# Altium PCB ZD-STM32-ZOUYU(remove layoout).PcbDoc (part 4 of 8)
Units mm, origin at the board's own origin, x right, y up, seen from the top; angles counter-clockwise.
Board outline 251.84 x 139.06 mm, 2 copper layers (Top Layer, Bottom Layer); 253 components, 246 nets, 1172 pads, 599 vias.
Unrouted connection lines stored in the file: 47.
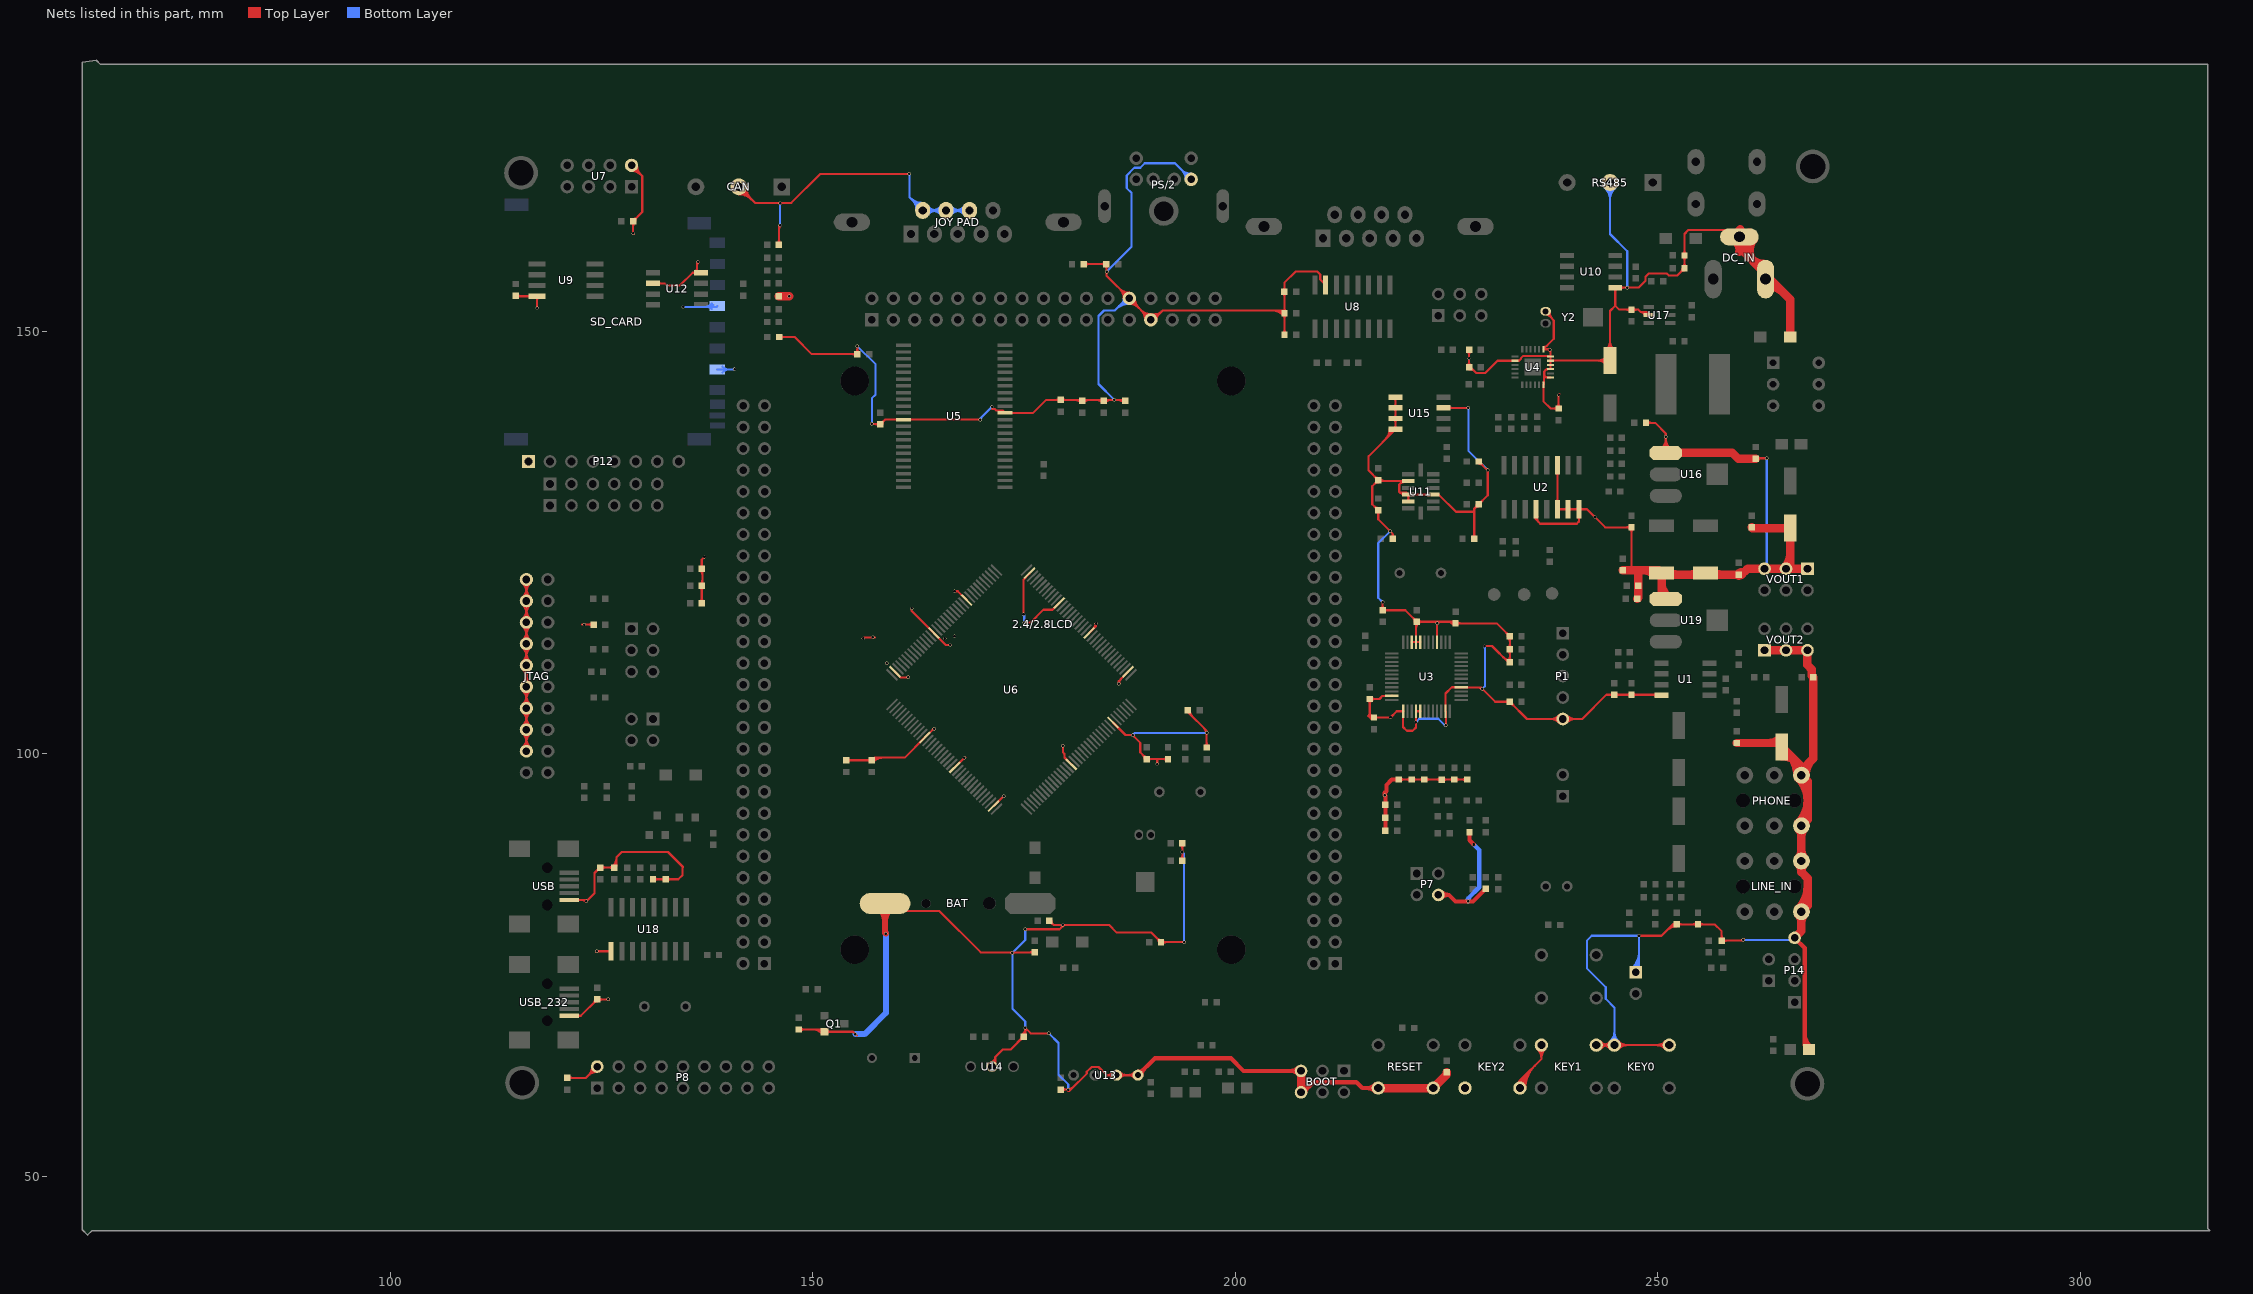
[diagram p4: the nets of this part, all layers, seen from the top]

## Via types
v1: diameter 0.4, hole 0.3, Top Layer to Bottom Layer, 598 vias
v2: diameter 0.3, hole 0.2, Top Layer to Bottom Layer, 1 vias

## Nets (pads, with @x,y where several pads share a name; then routed paths per layer and width w, separated by ;. In a path a pad name is that pad's centre, name@x,y a point inside that pad or via, vN(x,y) a via of type N, cw(c..) or ccw(c..) an arc to the next point about the centre after c; other vN are vias at no path point) (continued)
GND: 2.4/2.8LCD.26 2.4/2.8LCD.27 "JOY PAD.6" "JOY PAD.7" "JOY PAD.8" BAT.2 BOOT.5 BOOT.6 C3.2 C6.2 C7.1 C8.1 C9.2 C10.1 C11.1 C12.1 C13.1 C14.1 C15.1 C16.1 C17.1 C18.1 C19.1 C20.1 C21.1 C24.1 C26.1 C27.1 C28.1 C29.2 C35.1 C36.1 C37.1 C38.1 C39.1 C40.1 C41.1 C42.1 C43.2 C44.1 C45.1 C46.1 C47.1 C48.1 C49.1 C50.1 C51.1 C52.2 C53.2 C54.2 C55.2 C56.2 C57.2 C58.2 C59.2 C60.2 C61.2 C62.2 C63.2 C64.2 C66.1 C68.1 C69.1 C70.2 C71.2 C72.2 C73.1 C74.1 C75.1 C76.2 C77.1 C78.1 C79.1 C80.1 C82.1 C83.1 C84.1 C85.2 C86.1 C87.1 C88.2 C89.1 C90.1 C91.2 C92.2 C93.1 C94.1 C95.1 C96.1 C97.1 C98.1 C99.1 CAN.2 D3.1 D5.1 D6.1 DC_IN.2 DC_IN.3 JTAG.4 JTAG.6 JTAG.8 JTAG.10 JTAG.12 JTAG.14 JTAG.16 JTAG.18 JTAG.20 KEY0.1 KEY1.1 KEY2.1 LINE_IN.3 OLED.1 P1.5 P7.4 P8.2 P12.1 P14.4 PHONE.3 PS/2.3 Q1.1 R9.1 R20.1 R24.1 R25.1 R42.1 R60.1 R65.2 RESET.2 RS485.2 SD_CARD.3 SD_CARD.6 SYS.2 U1.4 U2.4 U2.6 U2.7 U2.8 U2.11 U3.4 U3.16 U3.20 U3.21 U3.22 U3.35 U3.37 U3.40 U3.41 U3.47 U4.1 U4.3 U4.4 U4.5 U4.6 U4.7 U4.14 U4.24 U5.12 U5.34 U6.16 U6.30 U6.38 U6.51 U6.61 U6.71 U6.83 U6.94 U6.107 U6.120 U6.130 U6.143 U7.1 U8.15 U9.4 U10.5 U11.2 U11.4 U11.5 U11.10 U12.2 U12.8 U13.3 U13.4 U14.2 U15.1 U15.2 U15.3 U15.4 U15.7 U16.1 U17.2 U18.1 U19.1 USB.5 USB_232.5 VOUT1.1 VOUT1.3 VOUT1.5 VOUT2.1 VOUT2.3 VOUT2.5 Y2.1 | length 1442
  Top Layer w0.254: C71.2@114.806,154.242 114.871,154.176 U9.4@117.348,154.176 v1(117.348,152.781) ; C71.2@114.986,154.062 cw(c115.262,153.786) 115.262,154.176 ; C71.2@114.986,154.421 ccw(c115.577,155.012) 115.577,154.176 ; JTAG.4@115.637,100.771 ccw(c114.574,101.834) 116.078,101.834 ccw(c117.582,101.834) JTAG.4@116.519,100.771 ; JTAG.6@115.637,102.429 cw(c114.574,101.366) 116.078,101.366 cw(c117.582,101.366) JTAG.6@116.519,102.429 ; JTAG.6@115.637,103.311 ccw(c114.574,104.374) 116.078,104.374 ccw(c117.582,104.374) JTAG.6@116.519,103.311 ; JTAG.8@115.637,104.969 cw(c114.574,103.906) 116.078,103.906 cw(c117.582,103.906) JTAG.8@116.519,104.969 ; JTAG.8@115.637,105.851 ccw(c114.574,106.914) 116.078,106.914 ccw(c117.582,106.914) JTAG.8@116.519,105.851 ; JTAG.10@115.637,107.509 cw(c114.574,106.446) 116.078,106.446 cw(c117.582,106.446) JTAG.10@116.519,107.509 ; JTAG.10@115.637,108.391 ccw(c114.574,109.454) 116.078,109.454 ccw(c117.582,109.454) JTAG.10@116.519,108.391 ; JTAG.12@115.637,110.049 cw(c114.574,108.986) 116.078,108.986 cw(c117.582,108.986) JTAG.12@116.519,110.049 ; JTAG.12@115.637,110.931 ccw(c114.574,111.994) 116.078,111.994 ccw(c117.582,111.994) JTAG.12@116.519,110.931 ; JTAG.14@115.637,112.589 cw(c114.574,111.526) 116.078,111.526 cw(c117.582,111.526) JTAG.14@116.519,112.589 ; JTAG.14@115.637,113.471 ccw(c114.574,114.534) 116.078,114.534 ccw(c117.582,114.534) JTAG.14@116.519,113.471 ; JTAG.16@115.637,115.129 cw(c114.574,114.066) 116.078,114.066 cw(c117.582,114.066) JTAG.16@116.519,115.129 ; JTAG.16@115.637,116.011 ccw(c114.574,117.074) 116.078,117.074 ccw(c117.582,117.074) JTAG.16@116.519,116.011 ; JTAG.18@115.637,117.669 cw(c114.574,116.606) 116.078,116.606 cw(c117.582,116.606) JTAG.18@116.519,117.669 ; JTAG.18@115.637,118.551 ccw(c114.574,119.614) 116.078,119.614 ccw(c117.582,119.614) JTAG.18@116.519,118.551 ; JTAG.20@115.637,120.209 cw(c114.574,119.146) 116.078,119.146 cw(c117.582,119.146) JTAG.20@116.519,120.209 ; JTAG.4@115.817,100.591 ccw(c115.187,101.221) 116.078,101.221 ccw(c116.969,101.221) JTAG.4@116.339,100.591 ; JTAG.6@115.817,102.609 cw(c115.187,101.979) 116.078,101.979 cw(c116.969,101.979) JTAG.6@116.339,102.609 ; JTAG.6@115.817,103.131 ccw(c115.187,103.761) 116.078,103.761 ccw(c116.969,103.761) JTAG.6@116.339,103.131 ; JTAG.8@115.817,105.149 cw(c115.187,104.519) 116.078,104.519 cw(c116.969,104.519) JTAG.8@116.339,105.149 ; JTAG.8@115.817,105.671 ccw(c115.187,106.301) 116.078,106.301 ccw(c116.969,106.301) JTAG.8@116.339,105.671 ; JTAG.10@115.817,107.689 cw(c115.187,107.059) 116.078,107.059 cw(c116.969,107.059) JTAG.10@116.339,107.689 ; JTAG.10@115.817,108.211 ccw(c115.187,108.841) 116.078,108.841 ccw(c116.969,108.841) JTAG.10@116.339,108.211 ; JTAG.12@115.817,110.229 cw(c115.187,109.599) 116.078,109.599 cw(c116.969,109.599) JTAG.12@116.339,110.229 ; JTAG.12@115.817,110.751 ccw(c115.187,111.381) 116.078,111.381 ccw(c116.969,111.381) JTAG.12@116.339,110.751 ; JTAG.14@115.817,112.769 cw(c115.187,112.139) 116.078,112.139 cw(c116.969,112.139) JTAG.14@116.339,112.769 ; JTAG.14@115.817,113.291 ccw(c115.187,113.921) 116.078,113.921 ccw(c116.969,113.921) JTAG.14@116.339,113.291 ; JTAG.16@115.817,115.309 cw(c115.187,114.679) 116.078,114.679 cw(c116.969,114.679) JTAG.16@116.339,115.309 ; JTAG.16@115.817,115.831 ccw(c115.187,116.461) 116.078,116.461 ccw(c116.969,116.461) JTAG.16@116.339,115.831 ; JTAG.18@115.817,117.849 cw(c115.187,117.219) 116.078,117.219 cw(c116.969,117.219) JTAG.18@116.339,117.849 ; JTAG.18@115.817,118.371 ccw(c115.187,119.001) 116.078,119.001 ccw(c116.969,119.001) JTAG.18@116.339,118.371 ; JTAG.20@115.817,120.389 cw(c115.187,119.759) 116.078,119.759 cw(c116.969,119.759) JTAG.20@116.339,120.389 ; JTAG.4@116.078,100.33 JTAG.6@116.078,102.87 JTAG.8@116.078,105.41 JTAG.10@116.078,107.95 JTAG.12@116.078,110.49 JTAG.14@116.078,113.03 JTAG.16@116.078,115.57 JTAG.18@116.078,118.11 JTAG.20@116.078,120.65 ; U9.4@116.511,154.051 ccw(c116.208,153.747) 116.208,154.176 ccw(c116.208,154.606) U9.4@116.511,154.302 ; U9.4@117.222,154.051 cw(c116.919,153.747) 117.348,153.747 cw(c117.777,153.747) U9.4@117.474,154.051 ; C63.2@120.906,61.658 123.126,61.658 P8.2@124.46,62.992 ; C63.2@121.085,61.479 cw(c121.519,61.045) 121.519,61.658 cw(c121.519,62.272) C63.2@121.085,61.838 ; USB_232.5@121.134,69.012 122.53,69.012 C96.1@124.46,70.942 v1(125.781,70.942) v1@125.857,70.866 ; USB.5@121.134,82.728 123.012,82.728 v1(123.19,82.55) 124.133,83.493 124.133,85.906 124.777,86.55 C91.2@124.843,86.55 C92.2@126.494,86.55 ; USB_232.5@122.121,68.925 cw(c122.331,68.715) 122.331,69.012 cw(c122.331,69.309) USB_232.5@122.121,69.099 ; USB.5@122.121,82.641 cw(c122.331,82.431) 122.331,82.728 cw(c122.331,83.025) USB.5@122.121,82.815 ; 122.584,82.728 cw(c122.584,81.944) v1@123.138,82.498 ; 122.682,115.316 R42.1@124.028,115.316 ; P8.2@123.837,62.992 cw(c122.333,62.992) 123.396,61.928 cw(c124.46,60.865) P8.2@124.46,62.369 ; R42.1@123.849,115.136 ccw(c123.415,114.703) 123.415,115.316 ccw(c123.415,115.929) R42.1@123.849,115.496 ; P8.2@124.091,62.992 cw(c123.2,62.992) 123.83,62.362 cw(c124.46,61.732) P8.2@124.46,62.623 ; C96.1@124.206,70.942 cw(c123.593,70.942) 124.026,70.509 cw(c124.46,70.075) C96.1@124.46,70.688 ; 124.298,86.071 cw(c124.843,85.526) C91.2@124.843,86.296 ; v1@124.333,76.581 v1(124.4,76.648) U18.1@126.111,76.648 ; 124.455,86.228 ccw(c124.133,86.55) C91.2@124.589,86.55 ; C96.1@124.64,70.763 cw(c125.073,70.329) 125.073,70.942 cw(c125.073,71.555) C96.1@124.64,71.122 ; C91.2@125.022,86.371 cw(c125.456,85.937) 125.456,86.55 cw(c125.456,87.164) C91.2@125.022,86.73 ; U18.1@125.989,76.526 ccw(c125.693,76.23) 125.693,76.648 ccw(c125.693,77.066) U18.1@125.989,76.77 ; C92.2@126.314,86.371 ccw(c125.88,85.937) 125.88,86.55 ccw(c125.88,87.164) C92.2@126.314,86.73 ; C92.2@126.316,86.732 ccw(c125.31,87.757) 126.746,87.757 ; 126.746,87.152 cw(c125.904,87.152) C92.2@126.494,86.55 ; U7.1@128.524,169.012 cw(c128.524,167.417) 129.651,168.545 cw(c130.779,169.672) U7.1@129.184,169.672 ; U7.1@128.524,169.266 cw(c128.524,168.284) 129.218,168.978 cw(c129.912,169.672) U7.1@128.93,169.672 ; U7.1@128.524,169.672 129.794,168.402 129.794,164.146 C70.2@128.714,163.066 v1(128.714,161.607) v1@128.778,161.544 ; C70.2@128.535,162.887 cw(c128.101,162.453) 128.714,162.453 cw(c129.328,162.453) C70.2@128.894,162.887 ; C70.2@128.714,163.32 ccw(c128.714,163.934) 129.148,163.5 ccw(c129.582,163.066) C70.2@128.969,163.066 ; U12.2@130.556,155.702 132.461,155.702 v1(132.715,155.448) 134.239,155.448 135.763,156.972 136.256,156.972 136.256,158.1 v1(136.398,158.242) ; C99.1@131.064,85.166 C98.1@132.588,85.166 134.061,85.166 134.556,85.661 134.556,86.577 134.607,86.627 132.842,88.392 127.381,88.392 126.746,87.757 ; C99.1@131.244,84.987 cw(c131.677,84.553) 131.677,85.166 cw(c131.677,85.779) C99.1@131.244,85.346 ; U12.2@131.707,155.567 cw(c132.032,155.242) 132.032,155.702 cw(c132.032,156.162) U12.2@131.707,155.837 ; C98.1@132.408,84.987 ccw(c131.975,84.553) 131.975,85.166 ccw(c131.975,85.779) C98.1@132.408,85.346 ; C98.1@132.768,84.987 cw(c133.201,84.553) 133.201,85.166 cw(c133.201,85.779) C98.1@132.768,85.346 ; U12.8@136.121,156.837 ccw(c135.796,156.512) 135.796,156.972 ccw(c135.796,157.432) 136.121,157.107 ccw(c135.796,157.432) 136.256,157.432 ccw(c136.716,157.432) U12.8@136.391,157.107 ; 136.256,157.723 cw(c136.917,157.723) v1@136.45,158.19 ; C60.2@136.663,118.034 ccw(c136.229,118.468) 136.843,118.468 ccw(c137.456,118.468) C60.2@137.022,118.034 ; C62.2@136.663,119.707 cw(c136.229,119.273) 136.843,119.273 cw(c137.456,119.273) C62.2@137.022,119.707 ; C62.2@136.663,120.066 ccw(c136.076,120.653) 136.906,120.653 ; C61.2@136.663,121.739 cw(c136.076,121.152) 136.906,121.152 ; C61.2@136.663,122.098 ccw(c136.229,122.532) 136.843,122.532 ccw(c137.456,122.532) C61.2@137.022,122.098 ; C60.2@136.843,117.854 C62.2@136.843,119.886 ; C61.2@136.843,121.918 136.843,122.999 v1(137.16,123.317) ; C62.2@136.906,120.142 C61.2@136.906,122.174 ; 136.906,120.346 ccw(c137.302,120.346) C62.2@137.022,120.066 ; 136.906,121.458 cw(c137.302,121.458) C61.2@137.022,121.739 ; CAN.2@141.224,166.259 cw(c141.224,164.151) 142.714,165.642 cw(c144.205,167.132) CAN.2@142.097,167.132 ; CAN.2@141.224,166.513 cw(c141.224,165.019) 142.281,166.075 cw(c143.337,167.132) CAN.2@141.843,167.132 ; CAN.2@141.224,167.132 143.129,165.227 144.526,165.227 147.447,165.227 150.876,168.656 v1(161.417,168.656) ; C68.1@145.794,160.454 ccw(c145.361,160.887) 145.974,160.887 ccw(c146.587,160.887) C68.1@146.153,160.454 ; 145.802,165.227 cw(c145.802,164.877) v1@146.049,165.125 ; C76.2@145.974,149.363 C76.2@145.987,149.35 147.83,149.35 149.858,147.322 C43.2@155.257,147.322 v1(155.257,148.273) ; C68.1@145.974,160.274 145.974,162.433 v1(146.101,162.56) ; 145.974,162.077 cw(c146.584,162.077) v1@146.152,162.508 ; v1@146.152,165.125 cw(c146.4,164.877) 146.4,165.227 ; C76.2@146.166,149.171 cw(c146.6,148.737) 146.6,149.35 cw(c146.6,149.964) C76.2@146.166,149.53 ; R60.1@148.336,67.386 151.088,67.386 Q1.1@151.352,67.122 154.747,67.122 v1(155.029,66.84) 155.194,66.675 ; R60.1@148.516,67.207 cw(c148.949,66.773) 148.949,67.386 cw(c148.949,67.999) R60.1@148.516,67.566 ; 149.909,67.386 cw(c149.909,65.704) Q1.1@151.099,66.894 ; 150.523,67.386 cw(c150.523,66.318) Q1.1@151.278,67.073 ; Q1.1@151.605,66.894 cw(c152.157,66.342) 152.157,67.122 cw(c152.157,67.902) Q1.1@151.605,67.35 ; C53.2@153.926,99.251 C52.2@156.974,99.251 ; C53.2@154.105,99.071 cw(c154.539,98.637) 154.539,99.251 cw(c154.539,99.864) C53.2@154.105,99.43 ; C43.2@155.078,147.142 ccw(c154.644,146.708) 154.644,147.322 ccw(c154.644,147.935) 155.078,147.501 ccw(c154.644,147.935) 155.257,147.935 ccw(c155.871,147.935) C43.2@155.437,147.501 ; v1(155.956,113.665) 156.083,113.792 157.353,113.792 ; C52.2@156.794,99.071 ccw(c156.36,98.637) 156.36,99.251 ccw(c156.36,99.864) C52.2@156.794,99.43 ; v1(156.972,139.065) 157.937,139.065 C39.1@157.988,139.014 158.545,139.571 U5.34@160.729,139.571 v1@169.797,139.571 ; C52.2@157.153,99.071 cw(c158.353,97.871) 158.353,99.568 ; 157.252,139.065 cw(c157.252,138.278) C39.1@157.808,138.835 ; 157.497,139.065 ccw(c157.497,139.505) C39.1@157.808,139.194 ; 157.74,99.568 ccw(c157.74,98.484) C52.2@156.974,99.251 ; C39.1@157.988,139.268 ccw(c157.988,139.881) 158.422,139.448 ccw(c158.855,139.014) C39.1@158.242,139.014 ; BAT.2@158.534,82.296 159.411,81.419 164.944,81.419 169.846,76.517 C54.2@176.274,76.517 ; U6.107@159.71,109.729 160.409,109.029 161.226,109.029 v1(161.29,109.093) ; 160.959,109.029 ccw(c160.959,109.424) v1@161.238,109.145 ; v1(161.671,117.221) 161.671,116.96 U6.94@164.306,114.325 165.728,112.903 v1(166.243,112.903) ; 164.134,102.84 cw(c164.338,102.636) v1@164.338,102.924 ; v1(164.338,102.997) 164.292,102.997 U6.120@163.245,101.95 160.863,99.568 157.291,99.568 C52.2@156.974,99.251 ; v1(166.751,119.253) 167.156,119.253 U6.83@168.195,118.214 ; U6.130@166.781,98.415 v1(167.934,99.568) v1@168.021,99.568 ; U14.2@171.076,63.501 ccw(c170.925,64.135) 171.577,64.135 ; U14.2@171.134,63.254 ccw(c171.001,63.814) 171.577,63.814 ; U14.2@171.196,62.992 171.577,63.373 171.577,64.135 ; 171.196,140.843 171.495,140.843 171.694,140.644 172.456,140.644 U5.12@172.729,140.371 176.058,140.371 177.597,141.91 C40.1@179.324,141.91 184.406,141.91 v1(185.674,141.91) 186.831,141.91 C57.2@186.946,141.796 ; U6.143@171.377,93.819 172.554,94.996 v1(172.593,94.996) ; 172.402,94.844 cw(c172.593,94.653) v1@172.593,94.923 ; 173.279,76.517 cw(c173.279,76.124) v1@173.557,76.402 ; v1@173.661,76.402 cw(c173.939,76.124) 173.939,76.517 ; C80.1@174.676,66.548 cw(c174.063,66.548) 174.496,66.114 cw(c174.93,65.681) C80.1@174.93,66.294 ; C80.1@174.761,66.738 ccw(c174.03,67.564) v1(175.133,67.564) ; v1(174.92,116.545) 174.92,120.631 175.62,121.331 U6.71@175.62,121.396 ; v1(175.006,115.551) 175.766,115.551 177.275,117.06 178.355,117.06 U6.61@179.155,117.86 ; 175.133,67 cw(c174.53,67) C80.1@174.93,66.548 ; v1(175.133,79.248) 179.197,79.248 v1@179.705,79.756 ; C54.2@176.095,76.338 ccw(c175.661,75.904) 175.661,76.517 ccw(c175.661,77.131) C54.2@176.095,76.697 ; v1(177.927,66.929) 175.768,66.929 v1(175.133,67.564) ; C46.1@177.978,80.01 cw(c177.978,79.397) 178.411,79.83 cw(c178.845,80.264) C46.1@178.232,80.264 ; C46.1@177.978,80.264 178.486,79.756 v1(179.578,79.756) v1@179.705,79.756 ; C40.1@179.144,141.73 ccw(c178.711,141.297) 178.711,141.91 ccw(c178.711,142.523) C40.1@179.144,142.089 ; C78.1@179.324,60.274 v1(180.213,60.274) 180.528,60.274 182.411,62.157 182.411,62.381 182.983,62.953 183.793,62.953 184.77,61.976 ; 179.364,79.415 ccw(c179.022,79.756) v1@179.505,79.756 ; C78.1@179.504,60.095 cw(c179.937,59.661) 179.937,60.274 cw(c179.937,60.887) C78.1@179.504,60.454 ; C40.1@179.504,141.73 cw(c179.937,141.297) 179.937,141.91 cw(c179.937,142.523) C40.1@179.504,142.089 ; v1(179.578,100.965) 179.578,100.193 179.769,100.002 179.769,99.58 180.569,98.78 U6.16@180.569,98.769 ; v1@180.213,60.093 ccw(c180.213,60.416) 180.442,60.188 ; v1@180.213,60.347 ccw(c180.213,61.284) 180.875,60.621 ; 180.976,141.91 cw(c180.976,140.906) C59.2@181.686,141.616 ; C41.1@182.042,157.988 C42.1@184.734,157.988 v1@184.734,157.15 ; C59.2@182.045,141.616 cw(c182.755,140.906) 182.755,141.91 ; C41.1@182.221,157.808 cw(c182.655,157.375) 182.655,157.988 cw(c182.655,158.601) C41.1@182.221,158.168 ; U6.51@182.691,114.325 183.515,115.149 v1(183.515,115.443) ; U6.51@183.183,114.817 ccw(c182.557,115.443) v1@183.442,115.443 ; 183.516,141.91 cw(c183.516,140.906) C58.2@184.226,141.616 ; C42.1@184.555,158.168 cw(c184.121,158.601) 184.121,157.988 cw(c184.121,157.375) 184.555,157.808 cw(c184.121,157.375) 184.734,157.375 cw(c185.347,157.375) C42.1@184.914,157.808 ; C58.2@184.585,141.616 cw(c185.295,140.906) 185.295,141.91 ; 184.734,156.8 cw(c185.084,156.8) v1@184.837,157.047 ; 184.734,157.398 ccw(c185.084,157.398) v1@184.837,157.151 ; v1(184.785,157.099) v1@184.734,157.15 ; U6.30@185.519,103.718 187.002,102.235 v1(187.833,102.235) 187.833,102.218 188.741,101.31 188.741,100.184 189.484,99.441 C50.1@189.484,99.39 190.754,99.39 ; U13.3@185.536,61.63 ccw(c184.77,60.955) 184.77,61.976 ; U13.3@185.536,62.322 cw(c184.77,62.997) 184.77,61.976 ; 186.056,141.91 cw(c186.056,140.906) C57.2@186.766,141.616 ; v1(186.182,108.331) 186.182,108.624 U6.38@187.287,109.729 ; v1@186.255,108.331 cw(c187.138,108.331) 186.514,108.956 ; U13.3@186.298,61.606 cw(c187.191,60.713) 187.191,61.976 cw(c187.191,63.239) U13.3@186.298,62.346 ; 2.4/2.8LCD.26@186.792,153.924 ccw(c185.197,153.924) 186.325,155.051 ccw(c187.452,156.179) 2.4/2.8LCD.26@187.452,154.584 ; 2.4/2.8LCD.26@187.046,153.924 ccw(c186.064,153.924) 186.758,154.618 ccw(c187.452,155.312) 2.4/2.8LCD.26@187.452,154.33 ; 2.4/2.8LCD.26@187.452,153.264 cw(c187.452,151.669) 188.579,152.797 cw(c189.707,153.924) 2.4/2.8LCD.26@188.112,153.924 ; 2.4/2.8LCD.26@187.452,153.518 cw(c187.452,152.536) 188.146,153.23 cw(c188.84,153.924) 2.4/2.8LCD.26@187.858,153.924 ; v1@187.906,102.235 ccw(c188.123,102.235) 187.969,102.082 ; U13.4@188.098,61.606 ccw(c187.205,60.713) 187.205,61.976 ccw(c187.205,63.239) U13.4@188.098,62.346 ; U13.4@188.468,61.976 U13.3@185.928,61.976 184.77,61.976 ; 189.014,99.911 cw(c188.494,99.39) C50.1@189.23,99.39 ; 189.137,99.788 ccw(c189.484,100.135) C50.1@189.484,99.644 ; 2.4/2.8LCD.27@189.332,151.384 ccw(c187.737,151.384) 188.865,152.511 ccw(c189.992,153.639) 2.4/2.8LCD.27@189.992,152.044 ; 2.4/2.8LCD.27@189.586,151.384 ccw(c188.604,151.384) 189.298,152.078 ccw(c189.992,152.772) 2.4/2.8LCD.27@189.992,151.79 ; C50.1@189.664,99.211 cw(c190.097,98.777) 190.097,99.39 cw(c190.097,100.003) C50.1@189.664,99.57 ; 2.4/2.8LCD.27@190.011,151.535 ccw(c190.113,152.337) 190.685,151.766 ; 2.4/2.8LCD.27@190.043,151.787 ccw(c190.195,152.988) 191.051,152.132 ; 2.4/2.8LCD.27@190.075,152.039 ccw(c190.278,153.638) 191.418,152.498 ; 2.4/2.8LCD.27@190.652,151.384 cw(c191.495,151.384) 190.899,151.98 ; v1(190.754,98.806) 190.754,99.39 ; C55.2@190.945,77.722 ccw(c190.331,77.722) 190.765,78.156 ccw(c191.198,78.59) C55.2@191.198,77.976 ; C55.2@191.378,77.543 cw(c191.812,77.109) 191.812,77.722 cw(c191.812,78.336) C55.2@191.378,77.902 ; C47.1@191.844,99.211 ccw(c191.411,98.777) 191.411,99.39 ccw(c191.411,100.003) C47.1@191.844,99.57 ; C47.1@192.024,99.39 190.754,99.39 ; C44.1@193.546,87.556 ccw(c193.113,87.989) 193.726,87.989 ccw(c194.339,87.989) C44.1@193.905,87.556 ; C45.1@193.546,89.228 cw(c193.113,88.795) 193.726,88.795 cw(c194.339,88.795) C45.1@193.905,89.228 ; C44.1@193.726,87.376 v1(193.726,88.392) C45.1@193.726,89.408 ; v1@193.927,77.722 C55.2@191.198,77.722 190.073,78.848 185.964,78.848 185.056,79.756 v1@179.705,79.756 ; C56.2@194.373,105.158 194.373,104.965 196.596,102.743 v1(196.596,102.489) C48.1@196.596,100.762 ; C56.2@194.627,105.158 ccw(c195.705,105.158) 194.943,104.396 ; 196.292,103.047 cw(c195.734,102.489) v1@196.523,102.489 ; C48.1@196.416,100.941 ccw(c195.983,101.375) 196.596,101.375 ccw(c197.209,101.375) C48.1@196.776,100.941 ; 204.352,152.498 cw(c204.352,150.682) 205.637,151.966 cw(c205.203,151.533) 205.816,151.533 cw(c206.429,151.533) C69.1@205.996,151.966 ; 204.965,152.498 cw(c204.965,151.295) C69.1@205.816,152.146 ; C69.1@205.579,152.498 cw(c205.579,151.908) 205.996,152.326 cw(c206.46,152.79) 205.803,152.79 ; C64.2@205.624,154.508 cw(c205.19,154.074) 205.803,154.074 cw(c206.417,154.074) C64.2@205.983,154.508 ; C64.2@205.624,154.867 ccw(c205.19,155.301) 205.803,155.301 ccw(c206.417,155.301) C64.2@205.983,154.867 ; C66.1@205.637,149.786 ccw(c205.203,150.219) 205.816,150.219 ccw(c206.429,150.219) C66.1@205.996,149.786 ; C69.1@205.637,152.326 ccw(c205.234,152.729) 205.803,152.729 ; C66.1@205.816,149.606 C69.1@205.816,152.146 ; U8.15@210.693,155.508 210.05,156.151 210.05,156.743 209.694,157.099 207.137,157.099 205.803,155.766 C64.2@205.803,154.688 C69.1@205.803,152.159 ; 215.72,104.497 ccw(c215.287,104.931) 215.9,104.931 ccw(c216.513,104.931) 216.08,104.497 ccw(c216.513,104.931) 216.513,104.318 ccw(c216.513,103.705) R25.1@216.08,104.138 ; R20.1@215.72,106.323 cw(c215.287,105.889) 215.9,105.889 cw(c216.513,105.889) 216.08,106.323 cw(c216.513,105.889) 216.513,106.502 cw(c216.513,107.115) R20.1@216.08,106.682 ; C75.1@216.662,128.854 ccw(c216.049,128.854) 216.482,129.288 ccw(c216.916,129.721) C75.1@216.916,129.108 ; C75.1@216.736,128.675 cw(c216.303,128.241) 216.916,128.241 cw(c217.529,128.241) C75.1@217.096,128.675 ; C74.1@216.916,132.156 ccw(c216.916,131.543) 216.482,131.977 ccw(c216.049,132.41) 216.662,132.41 ccw(c216.049,132.41) 216.482,132.844 ccw(c216.916,133.277) C74.1@216.916,132.664 ; C74.1@217.096,132.59 ccw(c217.805,133.299) 217.805,132.296 ; C14.1@217.244,117.197 ccw(c216.811,117.631) 217.424,117.631 ccw(c218.037,117.631) 217.604,117.197 ccw(c218.037,117.631) 218.037,117.018 ccw(c218.037,116.405) C14.1@217.604,116.838 ; v1(217.424,117.983) C14.1@217.424,117.018 220.116,117.018 C11.1@221.488,115.646 ; 217.756,137.238 ccw(c216.563,138.43) U15.4@218.249,138.43 ; 218.189,137.671 ccw(c217.43,138.43) U15.4@218.504,138.43 ; C20.1@218.445,125.662 ccw(c218.073,126.06) 218.618,126.06 ; U3.35@218.527,106.896 218.504,106.873 217.423,106.873 217.052,106.502 R20.1@215.9,106.502 215.9,104.318 v1(218.364,104.318) 219.092,105.046 U3.37@219.877,105.046 219.85,105.019 219.85,103.192 220.299,102.743 220.98,102.743 221.377,103.14 v1(221.377,103.775) ; C20.1@218.618,125.476 218.618,126.06 ; 218.623,138.105 ccw(c218.298,138.43) U15.4@218.757,138.43 ; C20.1@218.791,125.662 cw(c219.163,126.06) 218.618,126.06 ; U15.4@218.813,138.565 ccw(c218.488,138.89) 218.948,138.89 ccw(c219.408,138.89) U15.4@219.083,138.565 ; U15.3@218.813,139.565 cw(c218.488,139.24) 218.948,139.24 cw(c219.408,139.24) U15.3@219.083,139.565 ; U15.3@218.813,139.835 ccw(c218.488,140.16) 218.948,140.16 ccw(c219.408,140.16) U15.3@219.083,139.835 ; U15.2@218.813,140.835 cw(c218.488,140.51) 218.948,140.51 cw(c219.408,140.51) U15.2@219.083,140.835 ; U15.2@218.813,141.105 ccw(c218.488,141.43) 218.948,141.43 ccw(c219.408,141.43) U15.2@219.083,141.105 ; U15.1@218.813,142.105 cw(c218.488,141.78) 218.948,141.78 cw(c219.408,141.78) U15.1@219.083,142.105 ; U15.1@218.948,142.24 U15.2@218.948,140.97 U15.3@218.948,139.7 U15.4@218.948,138.43 215.773,135.255 215.773,133.553 C74.1@216.916,132.41 ; C26.1@219.329,96.977 C27.1@220.853,96.977 C28.1@222.377,96.977 C35.1@225.933,96.977 C36.1@227.457,96.977 ; 219.467,131.964 cw(c219.972,131.458) U11.2@219.972,132.173 ; C26.1@219.509,96.798 cw(c219.942,96.364) 219.942,96.977 cw(c219.942,97.59) C26.1@219.509,97.157 ; U11.4@219.84,130.919 cw(c219.84,130.647) U11.4@220.095,130.742 ; U11.4@219.857,130.653 ccw(c219.474,130.511) 219.474,130.919 ; U11.2@219.885,132.209 ccw(c219.675,131.999) 219.675,132.296 ccw(c219.675,132.593) U11.2@219.885,132.383 ; U11.4@220.205,130.919 cw(c220.205,130.783) U11.4@220.333,130.83 ; U11.5@220.385,129.983 ccw(c220.175,130.193) 220.472,130.193 ccw(c220.769,130.193) U11.5@220.559,129.983 ; U11.4@220.385,130.609 cw(c220.175,130.399) 220.472,130.399 cw(c220.769,130.399) U11.4@220.559,130.609 ; U11.5@220.472,129.896 U11.4@220.472,130.696 ; C27.1@220.673,96.798 ccw(c220.24,96.364) 220.24,96.977 ccw(c220.24,97.59) C27.1@220.673,97.157 ; U3.22@220.877,113.246 U3.21@221.377,113.246 ; C27.1@221.033,96.798 cw(c221.466,96.364) 221.466,96.977 cw(c221.466,97.59) C27.1@221.033,97.157 ; U11.4@221.059,130.609 cw(c221.269,130.399) 221.269,130.696 cw(c221.269,130.993) U11.4@221.059,130.783 ; C11.1@221.234,115.646 ccw(c220.621,115.646) 221.054,116.08 ccw(c221.488,116.513) C11.1@221.488,115.9 ; v1@221.361,103.759 v1(221.377,103.775) ; 221.377,114.765 cw(c222.369,114.765) 221.668,115.467 cw(c222.101,115.033) 222.101,115.646 cw(c222.101,116.259) C11.1@221.668,115.826 ; U3.41@221.877,105.046 U3.40@221.377,105.046 v1(221.377,103.775) ; U3.20@221.877,113.246 U3.21@221.377,113.246 ; C28.1@222.197,96.798 ccw(c221.764,96.364) 221.764,96.977 ccw(c221.764,97.59) C28.1@222.197,97.157 ; C28.1@222.557,96.798 cw(c222.99,96.364) 222.99,96.977 cw(c222.99,97.59) C28.1@222.557,97.157 ; U11.10@222.839,130.609 ccw(c222.629,130.399) 222.629,130.696 ccw(c222.629,130.993) U11.10@222.839,130.783 ; 223.764,96.977 cw(c223.764,96.321) C29.2@224.228,96.785 ; 223.825,96.977 ccw(c223.825,97.547) C29.2@224.228,97.144 ; U3.16@223.877,113.246 223.877,115.622 v1@223.901,115.646 ; v1@223.929,115.429 cw(c224.452,114.906) 224.452,115.646 ; C29.2@224.587,96.785 cw(c225.051,96.321) 225.051,96.977 ; C29.2@224.587,97.144 ccw(c224.99,97.547) 224.99,96.977 ; U15.7@224.648,140.97 v1(227.584,140.97) ; v1(224.917,103.378) 224.917,105.006 U3.47@224.877,105.046 224.877,107.148 225.625,107.896 U3.4@226.727,107.896 U3.4@226.765,107.858 ; 224.985,115.646 cw(c224.985,114.383) C12.1@225.879,115.276 ; U15.7@225.291,140.835 cw(c225.616,140.51) 225.616,140.97 cw(c225.616,141.43) U15.7@225.291,141.105 ; 225.598,115.646 cw(c225.598,114.996) C12.1@226.058,115.456 ; C35.1@225.753,96.798 ccw(c225.32,96.364) 225.32,96.977 ccw(c225.32,97.59) C35.1@225.753,97.157 ; C35.1@226.113,96.798 cw(c226.546,96.364) 226.546,96.977 cw(c226.546,97.59) C35.1@226.113,97.157 ; C12.1@226.238,115.276 cw(c226.672,114.842) 226.672,115.456 cw(c226.672,116.069) C12.1@226.238,115.635 ; U3.4@226.773,107.85 U3.4@226.765,107.858 ; C36.1@227.277,96.798 ccw(c226.844,96.364) 226.844,96.977 ccw(c226.844,97.59) C36.1@227.277,97.157 ; C19.1@227.481,145.976 ccw(c227.047,146.409) 227.66,146.409 ccw(c228.273,146.409) C19.1@227.84,145.976 ; C18.1@227.481,147.648 cw(c227.047,147.215) 227.66,147.215 cw(c228.273,147.215) C18.1@227.84,147.648 ; C19.1@227.66,145.542 cw(c227.66,144.547) 228.364,145.251 ; C18.1@227.66,147.828 C19.1@227.66,145.796 227.818,145.796 228.528,145.086 229.561,145.086 231.021,146.546 U4.14@233.103,146.546 233.59,146.546 ; C21.1@228.09,125.656 ccw(c227.657,126.089) 228.27,126.089 ccw(c228.883,126.089) C21.1@228.449,125.656 ; C21.1@228.27,125.476 228.27,128.651 ; C3.2@228.536,129.538 cw(c227.923,129.538) 228.357,129.105 cw(c228.79,128.671) C3.2@228.79,129.284 ; 228.673,107.858 cw(c228.673,107.142) v1@229.18,107.648 ; C3.2@228.79,129.792 ccw(c228.79,130.406) 229.224,129.972 ccw(c229.658,129.538) C3.2@229.044,129.538 ; C6.2@228.79,134.364 cw(c228.79,133.751) 229.224,134.185 cw(c229.658,134.618) C6.2@229.044,134.618 ; C6.2@228.79,134.618 229.87,133.539 229.87,130.618 C3.2@228.79,129.538 228.27,129.018 228.27,128.651 ; v1(229.489,112.776) 230.378,112.776 232.283,110.871 C16.1@232.486,110.871 C15.1@232.486,112.395 C13.1@232.486,113.919 230.95,115.456 C12.1@226.058,115.456 ; 229.634,133.775 ccw(c229.87,134.01) v1@229.87,133.677 ; 231.706,111.448 ccw(c232.486,112.229) C16.1@232.486,111.125 ; C13.1@232.232,113.919 ccw(c231.619,113.919) 232.053,114.353 ccw(c232.486,114.786) C13.1@232.486,114.173 ; C17.1@232.307,105.992 ccw(c231.873,105.559) 231.873,106.172 ccw(c231.873,106.785) C17.1@232.307,106.352 ; C16.1@232.307,111.051 ccw(c231.873,111.484) 232.486,111.484 ccw(c233.099,111.484) C16.1@232.666,111.051 ; C15.1@232.307,112.215 cw(c231.873,111.782) 232.486,111.782 cw(c233.099,111.782) C15.1@232.666,112.215 ; C15.1@232.307,112.575 ccw(c231.873,113.008) 232.486,113.008 ccw(c233.099,113.008) C15.1@232.666,112.575 ; C13.1@232.307,113.739 cw(c231.873,113.306) 232.486,113.306 cw(c233.099,113.306) C13.1@232.666,113.739 ; C17.1@232.486,105.918 cw(c232.486,105.305) 232.92,105.738 cw(c233.353,106.172) C17.1@232.74,106.172 ; KEY2.1@233.324,60.452 cw(c234.612,60.452) 233.702,61.363 ; U4.14@233.376,146.545 ccw(c233.483,146.654) 233.59,146.546 ; U4.14@233.378,146.544 ccw(c233.378,147.052) 233.737,146.693 ; KEY2.1@233.578,60.452 cw(c235.479,60.452) 234.135,61.796 ; KEY2.1@233.68,60.452 233.68,61.341 236.22,63.881 KEY1.1@236.22,65.532 ; KEY2.1@233.832,60.452 cw(c236.347,60.452) 234.569,62.23 ; KEY2.1@234.086,60.452 cw(c237.214,60.452) 235.002,62.663 ; KEY2.1@234.34,60.452 cw(c238.081,60.452) 235.436,63.097 ; U2.4@235.509,128.2 ccw(c235.918,128.047) 235.609,127.738 ; U2.4@235.585,128.972 235.585,127.762 ; U2.4@235.747,128.111 ccw(c236.323,127.895) 235.888,127.459 ; KEY1.1@235.753,65.065 cw(c234.626,63.938) 236.22,63.938 cw(c237.814,63.938) KEY1.1@236.687,65.065 ; KEY1.1@235.933,65.245 cw(c235.239,64.551) 236.22,64.551 cw(c237.201,64.551) KEY1.1@236.507,65.245 ; U4.7@236.454,147.916 ccw(c236.454,147.962) U4.7@236.486,147.93 ; U4.7@236.454,148.17 ccw(c236.454,148.829) 236.92,148.363 ; U4.24@236.455,143.968 ccw(c236.273,144.151) 236.531,144.151 ; 236.671,145.399 cw(c237.03,145.04) 237.03,145.548 ccw(c236.981,145.171) 236.712,145.44 ; 236.684,144.679 ccw(c237.012,145.007) U4.1@237.03,144.544 ; Y2.1@236.728,152.4 236.728,152.285 237.69,151.323 237.69,149.133 U4.7@236.454,147.897 237.04,147.897 237.305,147.632 U4.6@237.305,147.046 ; 236.849,147.123 cw(c236.849,146.865) U4.6@237.032,147.047 ; Y2.1@236.855,152.019 cw(c236.855,151.682) 237.093,151.92 ; 236.893,147.897 cw(c236.893,147.485) 237.184,147.776 cw(c236.893,147.485) 237.305,147.485 ; Y2.1@236.981,152.389 ccw(c237.682,152.326) 237.185,151.829 ; Y2.1@237.234,152.366 ccw(c238.388,152.263) 237.569,151.444 ; U4.1@237.305,144.546 237.282,144.569 236.795,144.569 236.578,144.786 236.578,145.306 ; U2.6@238.003,129.894 ccw(c237.707,130.19) 238.125,130.19 ccw(c238.543,130.19) U2.6@238.247,129.894 ; U2.11@238.003,133.25 cw(c237.707,132.954) 238.125,132.954 cw(c238.543,132.954) U2.11@238.247,133.25 ; C87.1@238.072,140.714 ccw(c237.639,140.281) 237.639,140.894 ccw(c237.639,141.507) 238.072,141.073 ccw(c237.639,141.507) 238.252,141.507 ccw(c238.865,141.507) C87.1@238.432,141.073 ; U2.11@238.125,134.172 U2.6@238.125,128.972 U2.7@239.395,128.972 U2.8@240.665,128.972 ; U2.6@238.247,128.85 cw(c238.543,128.554) 238.543,128.972 cw(c238.543,129.39) U2.6@238.247,129.094 ; P1.5@238.319,103.699 ccw(c237.256,102.636) 237.256,104.14 ccw(c237.256,105.644) P1.5@238.319,104.581 ; v1@238.379,142.621 v1(238.252,142.494) C87.1@238.252,140.894 237.312,140.894 236.454,141.752 U4.24@236.454,143.695 236.531,143.772 236.531,145.259 236.578,145.306 ; P1.5@238.499,103.879 ccw(c237.869,103.249) 237.869,104.14 ccw(c237.869,105.031) P1.5@238.499,104.401 ; P1.5@239.021,103.879 cw(c239.651,103.249) 239.651,104.14 cw(c239.651,105.031) P1.5@239.021,104.401 ; P1.5@239.201,103.699 cw(c240.264,102.636) 240.264,104.14 cw(c240.264,105.644) P1.5@239.201,104.581 ; U2.7@239.273,128.85 ccw(c238.977,128.554) 238.977,128.972 ccw(c238.977,129.39) U2.7@239.273,129.094 ; U2.7@239.517,128.85 cw(c239.813,128.554) 239.813,128.972 cw(c239.813,129.39) U2.7@239.517,129.094 ; U2.8@240.543,128.05 cw(c240.247,127.754) 240.665,127.754 cw(c241.083,127.754) U2.8@240.787,128.05 ; U2.8@240.543,128.85 ccw(c240.247,128.554) 240.247,128.972 ccw(c240.247,129.39) U2.8@240.543,129.094 ; U2.8@240.787,128.85 cw(c241.083,128.554) 241.083,128.972 cw(c241.083,129.39) U2.8@240.787,129.094 ; KEY1.1@242.72,65.532 KEY0.1@244.856,65.532 KEY0.1@251.356,65.532 ; KEY1.1@243.007,65.245 cw(c243.701,64.551) 243.701,65.532 cw(c243.701,66.513) KEY1.1@243.007,65.819 ; KEY1.1@243.187,65.065 cw(c244.314,63.938) 244.314,65.532 cw(c244.314,67.126) KEY1.1@243.187,65.999 ; C88.2@243.907,146.123 ccw(c242.844,145.06) 242.844,146.564 ccw(c242.844,148.068) C88.2@243.907,147.005 ; C88.2@243.907,147.855 ccw(c242.844,148.918) 244.348,148.918 ccw(c245.852,148.918) C88.2@244.789,147.855 ; C88.2@244.087,146.303 ccw(c243.457,145.673) 243.457,146.564 ccw(c243.457,147.455) C88.2@244.087,146.825 ; C88.2@244.087,147.675 ccw(c243.457,148.305) 244.348,148.305 ccw(c245.239,148.305) C88.2@244.609,147.675 ; KEY0.1@244.389,65.065 ccw(c243.262,63.938) 243.262,65.532 ccw(c243.262,67.126) KEY0.1@244.389,65.999 ; KEY0.1@244.569,65.245 ccw(c243.875,64.551) 243.875,65.532 ccw(c243.875,66.513) KEY0.1@244.569,65.819 ; R9.1@244.676,106.831 ccw(c244.243,106.397) 244.243,107.01 ccw(c244.243,107.623) R9.1@244.676,107.19 ; U10.5@244.833,155.059 cw(c244.508,154.734) 244.968,154.734 cw(c245.428,154.734) U10.5@245.103,155.059 ; R9.1@245.036,106.831 cw(c245.469,106.397) 245.469,107.01 cw(c245.469,107.623) R9.1@245.036,107.19 ; KEY0.1@245.143,65.245 cw(c245.837,64.551) 245.837,65.532 cw(c245.837,66.513) KEY0.1@245.143,65.819 ; KEY0.1@245.323,65.065 cw(c246.45,63.938) 246.45,65.532 cw(c246.45,67.126) KEY0.1@245.323,65.999 ; U10.5@245.611,155.059 cw(c245.936,154.734) 245.936,155.194 cw(c245.936,155.654) U10.5@245.611,155.329 ; C7.1@246.708,106.831 ccw(c246.275,106.397) 246.275,107.01 ccw(c246.275,107.623) C7.1@246.708,107.19 ; C86.1@246.708,127.002 cw(c246.275,127.435) 246.275,126.822 cw(c246.275,126.209) 246.708,126.643 cw(c246.275,126.209) 246.888,126.209 cw(c247.501,126.209) C86.1@247.068,126.643 ; R65.2@246.71,152.411 ccw(c246.276,151.977) 246.276,152.59 ccw(c246.276,153.204) R65.2@246.71,152.77 ; 247.015,121.742 246.888,121.869 C86.1@246.888,126.822 243.764,126.822 241.614,128.972 U2.8@240.665,128.972 ; C7.1@247.068,106.831 cw(c247.501,106.397) 247.501,107.01 cw(c247.501,107.623) C7.1@247.068,107.19 ; R65.2@247.069,152.411 cw(c247.503,151.977) 247.503,152.59 cw(c247.503,153.204) R65.2@247.069,152.77 ; v1(247.777,78.486) 250.444,78.486 251.79,79.832 ; 248.256,152.327 cw(c248.256,151.913) U17.2@248.664,151.978 ; U17.2@248.414,151.938 ccw(c247.958,151.866) 247.958,152.327 ; 248.553,152.327 cw(c248.553,151.96) U17.2@248.915,152.018 ; 248.597,152.281 cw(c248.37,152.054) U17.2@248.65,151.896 ; C72.2@248.602,139.19 249.684,139.19 250.95,137.924 U16.1@250.95,135.635 ; C72.2@248.782,139.011 cw(c249.216,138.577) 249.216,139.19 cw(c249.216,139.804) C72.2@248.782,139.37 ; U17.2@248.833,152.045 cw(c248.672,151.883) U17.2@248.871,151.771 ; U17.2@248.92,151.958 248.551,152.327 247.958,152.327 ; 249.292,107.01 cw(c249.292,106.29) U1.4@249.801,106.799 ; U1.4@250.444,106.934 250.368,107.01 C7.1@246.888,107.01 R9.1@244.856,107.01 243.916,107.01 241.046,104.14 P1.5@238.76,104.14 234.518,104.14 C17.1@232.486,106.172 230.759,106.172 v1(229.231,107.7) 229.073,107.858 U3.4@226.765,107.858 ; U16.1@250.456,136.129 ccw(c249.264,137.322) 250.95,137.322 ccw(c252.637,137.322) U16.1@251.444,136.129 ; U16.1@250.636,135.949 ccw(c249.877,136.708) 250.95,136.708 ccw(c252.023,136.708) U16.1@251.265,135.949 ; KEY0.1@250.889,65.065 ccw(c249.762,63.938) 249.762,65.532 ccw(c249.762,67.126) KEY0.1@250.889,65.999 ; 251.051,79.093 cw(c252.222,77.923) C37.1@252.222,79.578 ; KEY0.1@251.069,65.245 ccw(c250.375,64.551) 250.375,65.532 ccw(c250.375,66.513) KEY0.1@251.069,65.819 ; 251.485,79.527 cw(c252.222,78.79) C37.1@252.222,79.832 ; 251.574,79.616 cw(c251.828,79.362) C37.1@252.059,79.638 ; 251.77,79.812 cw(c252.007,79.576) C37.1@252.222,79.832 ; C37.1@252,79.709 ccw(c251.79,79.592) 251.79,79.832 ; C37.1@252,79.956 cw(c251.79,80.072) 251.79,79.832 ; C37.1@252.402,79.653 cw(c252.835,79.219) 252.835,79.832 cw(c252.835,80.445) C37.1@252.402,80.012 ; C89.1@252.908,157.48 cw(c252.295,157.48) 252.728,157.046 cw(c253.162,156.613) C89.1@253.162,157.226 ; C89.1@252.982,157.66 ccw(c252.549,158.093) 253.162,158.093 ccw(c253.775,158.093) C89.1@253.341,157.66 ; C90.1@252.982,158.824 cw(c252.549,158.391) 253.162,158.391 cw(c253.775,158.391) C90.1@253.341,158.824 ; C90.1@252.982,159.184 ccw(c252.549,159.617) 253.162,159.617 ccw(c253.775,159.617) C90.1@253.341,159.184 ; C38.1@254.582,79.653 ccw(c254.149,79.219) 254.149,79.832 ccw(c254.149,80.445) C38.1@254.582,80.012 ; C38.1@254.942,79.653 cw(c255.375,79.219) 255.375,79.832 cw(c255.375,80.445) C38.1@254.942,80.012 ; C77.1@257.376,78.081 ccw(c256.943,78.515) 257.556,78.515 ccw(c258.169,78.515) 257.736,78.081 ccw(c258.169,78.515) 258.169,77.902 ccw(c258.169,77.289) C77.1@257.736,77.722 ; DC_IN.3@259.663,161.21 258.86,162.013 253.623,162.013 253.162,161.552 C90.1@253.162,159.004 C89.1@253.162,157.48 252.336,156.655 251.286,156.655 251.074,156.867 248.937,156.867 248.542,156.472 248.542,156.016 247.72,155.194 U10.5@244.968,155.194 244.968,153.05 ; 259.717,77.902 ccw(c259.717,78.385) v1@260.058,78.043 ; v1@260.223,78.105 v1(260.11,77.992) 260.02,77.902 C77.1@257.556,77.902 257.556,78.994 256.718,79.832 C38.1@254.762,79.832 C37.1@252.222,79.832 ; C92.2@126.494,86.55 126.746,86.803 126.746,87.757 ; 171.577,64.135 172.466,65.024 173.406,65.024 C80.1@174.93,66.548 ; C80.1@174.93,66.548 175.133,66.751 v1(175.133,67.564) ; v1@184.734,157.15 184.734,156.642 2.4/2.8LCD.26@187.452,153.924 2.4/2.8LCD.27@189.992,151.384 190.303,151.384 191.418,152.498 205.464,152.498 C69.1@205.803,152.159 ; C69.1@205.803,152.159 C69.1@205.816,152.146 ; C74.1@216.916,132.41 216.21,131.704 216.21,129.561 C75.1@216.916,128.854 216.916,127.762 v1(218.313,126.365) 218.618,126.06 ; C74.1@216.916,132.41 217.03,132.296 U11.2@220.472,132.296 219.799,132.296 219.395,131.892 219.395,130.998 219.474,130.919 ; 219.474,130.919 220.249,130.919 U11.4@220.472,130.696 ; U11.4@220.472,130.696 U11.10@223.426,130.696 224.088,130.696 226.114,128.67 228.251,128.67 228.27,128.651 ; U3.21@221.377,113.246 221.377,115.535 C11.1@221.488,115.646 ; C11.1@221.488,115.646 v1@223.901,115.646 ; v1@223.901,115.646 225.868,115.646 C12.1@226.058,115.456 ; 233.59,146.546 233.83,146.786 233.83,146.884 234.069,147.123 237.228,147.123 U4.6@237.305,147.046 ; 235.585,127.762 cw(c235.984,127.762) 235.706,128.048 ccw(c235.984,127.762) 235.585,127.762 ; 235.585,127.762 ccw(c235.186,127.762) 235.464,128.048 cw(c235.186,127.762) 235.585,127.762 ; 235.585,127.762 236.093,127.254 240.411,127.254 240.665,127.508 U2.8@240.665,128.972 ; 236.578,145.306 236.818,145.546 U4.3@237.305,145.546 U4.4@237.305,146.046 U4.5@237.305,146.546 ; U4.5@237.305,146.546 U4.6@237.305,147.046 ; U4.5@237.305,146.546 237.323,146.564 C88.2@244.348,146.564 244.348,152.43 244.968,153.05 ; 244.968,153.05 245.427,152.59 R65.2@246.89,152.59 247.695,152.59 247.958,152.327 ; 251.79,79.832 C37.1@252.222,79.832
  Top Layer w0.3: C97.1@261.62,134.95 261.671,135.001 v1(262.89,135.001)
  Top Layer w0.5: U13.4@188.468,61.976 190.48,63.988 199.472,63.988 200.976,62.484 BOOT.5@207.772,62.484 ; U13.4@188.468,62.376 ccw(c188.468,63.342) 189.151,62.659 ccw(c189.834,61.976) U13.4@188.868,61.976 ; BOOT.5@207.418,62.13 ccw(c206.565,61.277) 206.565,62.484 ccw(c206.565,63.691) BOOT.5@207.418,62.838 ; BOOT.6@207.772,59.944 208.026,59.944 209.226,61.144 214.319,61.144 215.011,60.452 RESET.2@216.916,60.452 ; BOOT.6@207.772,60.444 ccw(c207.772,62.264) 209.059,60.977 ; BOOT.6@208.272,59.944 cw(c208.866,59.944) 208.446,60.364 ; RESET.2@216.536,60.072 ccw(c215.619,59.155) 215.619,60.452 ccw(c215.619,61.749) RESET.2@216.536,60.832 ; C49.1@217.754,90.932 C82.1@217.754,92.456 C83.1@217.754,93.98 217.754,95.047 v1(217.678,95.123) 217.678,95.402 217.874,95.598 217.874,96.335 218.516,96.977 C26.1@219.329,96.977 ; P7.4@224.028,83.312 225.298,83.312 226.06,82.55 228.143,82.55 R24.1@229.616,84.023 ; P7.4@224.382,82.958 cw(c225.235,82.105) 225.235,83.312 cw(c225.235,84.519) P7.4@224.382,83.666 ; C24.1@227.711,90.754 227.711,89.789 v1(228.219,89.281) ; P14.4@266.192,78.232 267.392,77.032 267.392,65.525 SYS.2@267.895,65.022 ; 267.392,65.802 ccw(c268.609,65.802) SYS.2@267.749,64.941 ; 267.392,67.009 ccw(c269.816,67.009) SYS.2@268.102,65.295
  Top Layer w0.7: BAT.2@157.897,81.66 cw(c156.361,80.123) 158.534,80.123 cw(c160.706,80.123) BAT.2@159.17,81.66 ; BAT.2@158.534,82.296 158.534,78.829 v1(158.623,78.74)
  Top Layer w1: C73.1@145.974,154.178 v1(147.193,154.178) ; BOOT.6@207.772,59.944 BOOT.5@207.772,62.484 ; RESET.2@216.916,60.452 RESET.2@223.416,60.452 225.044,62.08 C51.1@225.044,62.306 ; C94.1@245.872,121.742 247.015,121.742 248.031,121.742 ; C95.1@247.574,118.364 247.701,118.491 C93.1@247.701,119.888 247.701,121.412 248.031,121.742 ; 248.293,121.742 cw(c248.293,120.011) D5.1@249.517,121.235 ; 250.444,120.372 ccw(c252.959,120.372) U19.1@251.181,118.593 ; U19.1@250.95,118.363 250.444,118.87 D5.1@250.444,121.412 ; U16.1@250.95,135.635 258.827,135.635 259.512,134.95 C97.1@261.62,134.95 ; D5.1@251.371,121.589 ccw(c252.227,122.445) 252.227,121.234 ; 253.868,121.234 ccw(c253.868,122.445) D6.1@254.724,121.589 ; D6.1@256.578,121.589 ccw(c257.434,122.445) 257.434,121.234 ; DC_IN.3@259.298,160.845 cw(c258.417,159.964) 259.663,159.964 cw(c260.909,159.964) DC_IN.3@260.028,160.845 ; C8.1@259.334,101.295 264.205,101.295 267.002,98.498 ; C79.1@259.504,121.318 cw(c260.033,120.789) 260.033,121.537 ; 259.663,159.418 cw(c260.939,159.418) DC_IN.3@260.935,160.694 ; DC_IN.3@259.663,160.421 cw(c260.936,160.421) DC_IN.3@260.931,161.694 ; DC_IN.3@259.771,162.133 ccw(c261.206,160.993) 259.91,159.698 ; DC_IN.3@259.837,161.036 DC_IN.3@259.663,161.21 259.663,159.945 262.763,156.845 DC_IN.2@262.763,156.21 263.271,156.21 265.684,153.797 D3.1@265.684,149.352 ; DC_IN.3@260.554,161.511 ccw(c262.089,160.292) 260.703,158.905 ; 260.798,158.81 ccw(c262.763,160.775) DC_IN.2@262.763,157.996 ; C84.1@261.112,126.822 261.194,126.74 C85.2@265.684,126.74 265.684,122.428 VOUT1.3@265.176,121.92 ; DC_IN.3@261.337,160.889 ccw(c262.973,159.59) 261.495,158.113 ; VOUT2.1@262.636,112.268 VOUT2.3@265.176,112.268 VOUT2.5@267.716,112.268 267.716,110.531 268.218,110.029 268.218,109.277 C10.1@268.402,109.093 268.402,99.444 267.002,98.044 PHONE.3@267.002,97.488 267.73,96.76 267.73,92.216 PHONE.3@267.002,91.488 LINE_IN.3@267.002,87.328 267.002,86.017 267.73,85.289 267.73,82.056 LINE_IN.3@267.002,81.328 ; DC_IN.2@262.725,156.424 cw(c262.744,155.668) DC_IN.2@263.278,156.203 ; DC_IN.2@262.751,155.424 cw(c262.827,152.456) 264.926,154.555 ; 263.131,101.295 ccw(c263.131,103.219) C9.2@264.491,101.859 ; C9.2@264.668,99.732 cw(c264.668,97.076) 266.546,98.954 ; VOUT1.3@264.999,122.097 ccw(c263.346,123.75) 265.684,123.75 ; 265.434,100.066 cw(c262.857,97.488) PHONE.3@266.502,97.488 ; P14.4@266.192,78.232 267.002,79.042 267.002,80.121 ; LINE_IN.3@266.648,80.974 cw(c265.795,80.121) 267.002,80.121 ; LINE_IN.3@266.648,81.682 ccw(c264.037,84.293) 267.73,84.293 ; LINE_IN.3@266.648,87.682 ccw(c265.795,88.535) 267.002,88.535 ccw(c268.209,88.535) LINE_IN.3@267.356,87.682 ; PHONE.3@266.648,91.134 cw(c265.795,90.281) 267.002,90.281 cw(c268.209,90.281) PHONE.3@267.356,91.134 ; PHONE.3@266.648,91.842 ccw(c264.037,94.453) 267.73,94.453 ; PHONE.3@266.648,97.134 cw(c264.037,94.523) 267.73,94.523 ; LINE_IN.3@267.356,80.974 ccw(c268.209,80.121) 267.002,80.121 ; PHONE.3@267.502,97.488 cw(c270.051,97.488) 268.249,99.291 ; VOUT1.1@267.716,121.92 VOUT1.3@265.176,121.92 ; 248.031,121.742 250.114,121.742 D5.1@250.444,121.412 ; D5.1@250.444,121.412 250.622,121.234 C79.1@259.588,121.234 259.891,121.537 260.261,121.537 260.643,121.92 VOUT1.5@262.636,121.92 ; VOUT1.5@262.636,121.92 VOUT1.3@265.176,121.92 ; VOUT1.5@262.636,121.92 VOUT1.3@265.176,121.92 ; 267.002,86.121 cw(c268.209,86.121) 267.356,86.974 ccw(c268.209,86.121) 267.002,86.121 ; 267.002,86.121 ccw(c265.795,86.121) 266.648,86.974 cw(c265.795,86.121) 267.002,86.121 ; C79.1@259.588,121.115 ccw(c259.588,121.719) 260.015,121.292 cw(c259.588,121.719) C79.1@259.588,121.115
  Bottom Layer w0.254: v1(134.62,152.908) 138.578,152.908 SD_CARD.3@138.675,153.005 ; 136.999,152.908 ccw(c136.999,154.381) SD_CARD.3@138.04,153.339 ; 137.467,152.908 cw(c137.467,152.097) SD_CARD.3@138.04,152.671 ; 137.612,152.908 ccw(c137.612,153.768) SD_CARD.3@138.22,153.16 ; SD_CARD.6@138.675,145.505 140.679,145.505 v1(140.716,145.542) ; SD_CARD.6@139.309,145.171 cw(c140.117,144.363) 140.117,145.505 cw(c140.117,146.647) SD_CARD.6@139.309,145.839 ; 140.45,145.505 ccw(c140.45,145.808) v1@140.664,145.594 ; v1@146.05,165.227 v1(146.101,165.176) v1(146.101,162.56) ; v1(155.257,148.273) 157.421,146.109 157.421,142.548 156.967,142.094 156.967,139.07 v1(156.972,139.065) ; v1(161.417,168.656) 161.417,165.913 162.992,164.338 165.76,164.338 168.529,164.338 ; 161.481,165.849 ccw(c162.983,167.351) 162.989,165.227 ; 161.781,165.549 cw(c160.697,164.465) 162.23,164.465 ; 161.912,165.418 ccw(c162.985,166.491) 162.99,164.973 ; 162.214,165.115 cw(c161.564,164.465) 162.484,164.465 ; 163.351,163.979 cw(c164.218,163.112) 164.218,164.338 cw(c164.218,165.564) 163.351,164.697 ; 163.531,163.799 cw(c164.831,162.498) 164.831,164.338 cw(c164.831,166.178) 163.531,164.877 ; 165.222,163.799 ccw(c163.921,162.498) 163.921,164.338 ccw(c163.921,166.178) 165.222,164.877 ; 165.401,163.979 ccw(c164.534,163.112) 164.534,164.338 ccw(c164.534,165.564) 165.401,164.697 ; 166.12,163.979 cw(c166.987,163.112) 166.987,164.338 cw(c166.987,165.564) 166.12,164.697 ; 166.299,163.799 cw(c167.6,162.498) 167.6,164.338 cw(c167.6,166.178) 166.299,164.877 ; 167.99,163.799 ccw(c166.689,162.498) 166.689,164.338 ccw(c166.689,166.178) 167.99,164.877 ; 168.17,163.979 ccw(c167.303,163.112) 167.303,164.338 ccw(c167.303,165.564) 168.17,164.697 ; v1(169.799,139.573) 169.799,139.7 v1(171.196,141.097) ; v1@169.872,139.573 cw(c170.355,139.573) 170.013,139.914 ; v1@174.868,116.494 cw(c174.536,116.161) 175.006,116.161 ; v1(174.92,116.545) 175.006,116.459 v1(175.006,115.551) ; v1(175.133,67.564) 175.133,68.326 173.609,69.85 v1(173.609,76.454) 175.133,77.978 v1(175.133,79.248) ; v1(177.927,66.929) 179.07,65.786 179.07,62.03 180.213,60.887 v1(180.213,60.274) ; v1(184.785,157.099) 187.706,160.02 187.706,166.411 187.139,166.978 187.139,168.479 188.045,169.385 188.733,169.385 189.274,169.926 192.852,169.926 PS/2.3@194.766,168.012 ; v1(185.674,141.91) 183.798,143.786 183.798,151.846 184.45,152.498 185.715,152.498 187.141,153.924 2.4/2.8LCD.26@187.452,153.924 ; 185.793,152.577 cw(c187.452,150.918) 2.4/2.8LCD.26@187.452,153.264 ; 186.227,153.01 cw(c187.452,151.785) 2.4/2.8LCD.26@187.452,153.518 ; 186.545,153.328 ccw(c185.949,153.924) 2.4/2.8LCD.26@186.792,153.924 ; 186.661,153.444 cw(c187.452,152.652) 2.4/2.8LCD.26@187.452,153.772 ; v1(187.833,102.235) 188.087,102.489 v1(196.596,102.489) ; v1@193.674,88.34 cw(c193.059,87.725) 193.929,87.725 ; v1(193.726,88.392) 193.929,88.189 v1(193.929,77.724) ; PS/2.3@194.093,168.012 ccw(c192.468,168.012) 193.617,169.161 ccw(c194.766,170.31) PS/2.3@194.766,168.685 ; PS/2.3@194.347,168.012 ccw(c193.335,168.012) 194.051,168.727 ccw(c194.766,169.443) PS/2.3@194.766,168.431 ; v1(217.424,117.983) 216.916,118.491 216.916,124.968 v1(218.313,126.365) ; v1(221.377,103.775) 221.761,104.159 224.009,104.159 224.79,103.378 v1(224.917,103.378) ; v1(227.584,140.97) 227.584,135.89 v1(229.87,133.604) ; v1(229.231,107.7) 229.527,107.996 229.527,112.738 v1(229.489,112.776) ; v1@229.437,112.724 cw(c229.221,112.508) 229.527,112.508 ; RS485.2@243.731,167.023 cw(c242.24,165.532) 244.348,165.532 cw(c246.456,165.532) RS485.2@244.965,167.023 ; RS485.2@243.91,167.202 cw(c242.854,166.146) 244.348,166.146 cw(c245.842,166.146) RS485.2@244.786,167.202 ; RS485.2@244.348,167.64 244.348,161.544 246.38,159.512 v1(246.38,155.194) ; KEY0.1@244.389,65.999 ccw(c243.262,67.126) 244.856,67.126 ccw(c246.45,67.126) KEY0.1@245.323,65.999 ; KEY0.1@244.569,65.819 ccw(c243.875,66.513) 244.856,66.513 ccw(c245.837,66.513) KEY0.1@245.143,65.819 ; KEY0.1@244.856,65.532 244.856,69.994 243.834,71.015 243.834,72.396 241.606,74.624 241.606,77.903 242.189,78.486 v1(247.777,78.486) 247.777,74.549 OLED.1@247.396,74.168 ; OLED.1@246.955,74.609 ccw(c244.972,76.592) 247.777,76.592 ; OLED.1@247.135,74.429 ccw(c245.585,75.979) 247.777,75.979 ; OLED.1@247.315,74.249 ccw(c246.199,75.365) 247.777,75.365 ; v1(260.11,77.992) 265.952,77.992 P14.4@266.192,78.232
  Bottom Layer w0.3: VOUT1.5@262.636,121.92 262.89,122.174 v1(262.89,135.001)
  Bottom Layer w0.5: v1@227.534,82.55 cw(c228.333,82.55) 227.768,83.115 ; v1@227.542,82.523 cw(c227.814,82.701) 227.584,82.931 ; v1(227.584,82.55) 227.584,82.931 ; v1(228.219,89.281) 228.869,88.631 228.869,84.216 227.584,82.931
  Bottom Layer w0.7: v1(155.029,66.84) 156.121,66.84 158.623,69.342 v1(158.623,78.74)
  other v1: 158.75,110.744 165.608,113.665 157.099,113.792 166.751,113.919 122.936,115.316 223.877,115.481 242.57,128.016 250.95,137.541 227.66,146.812 237.236,147.828